# EAGLE board combined2 (EAGLE 5.11)
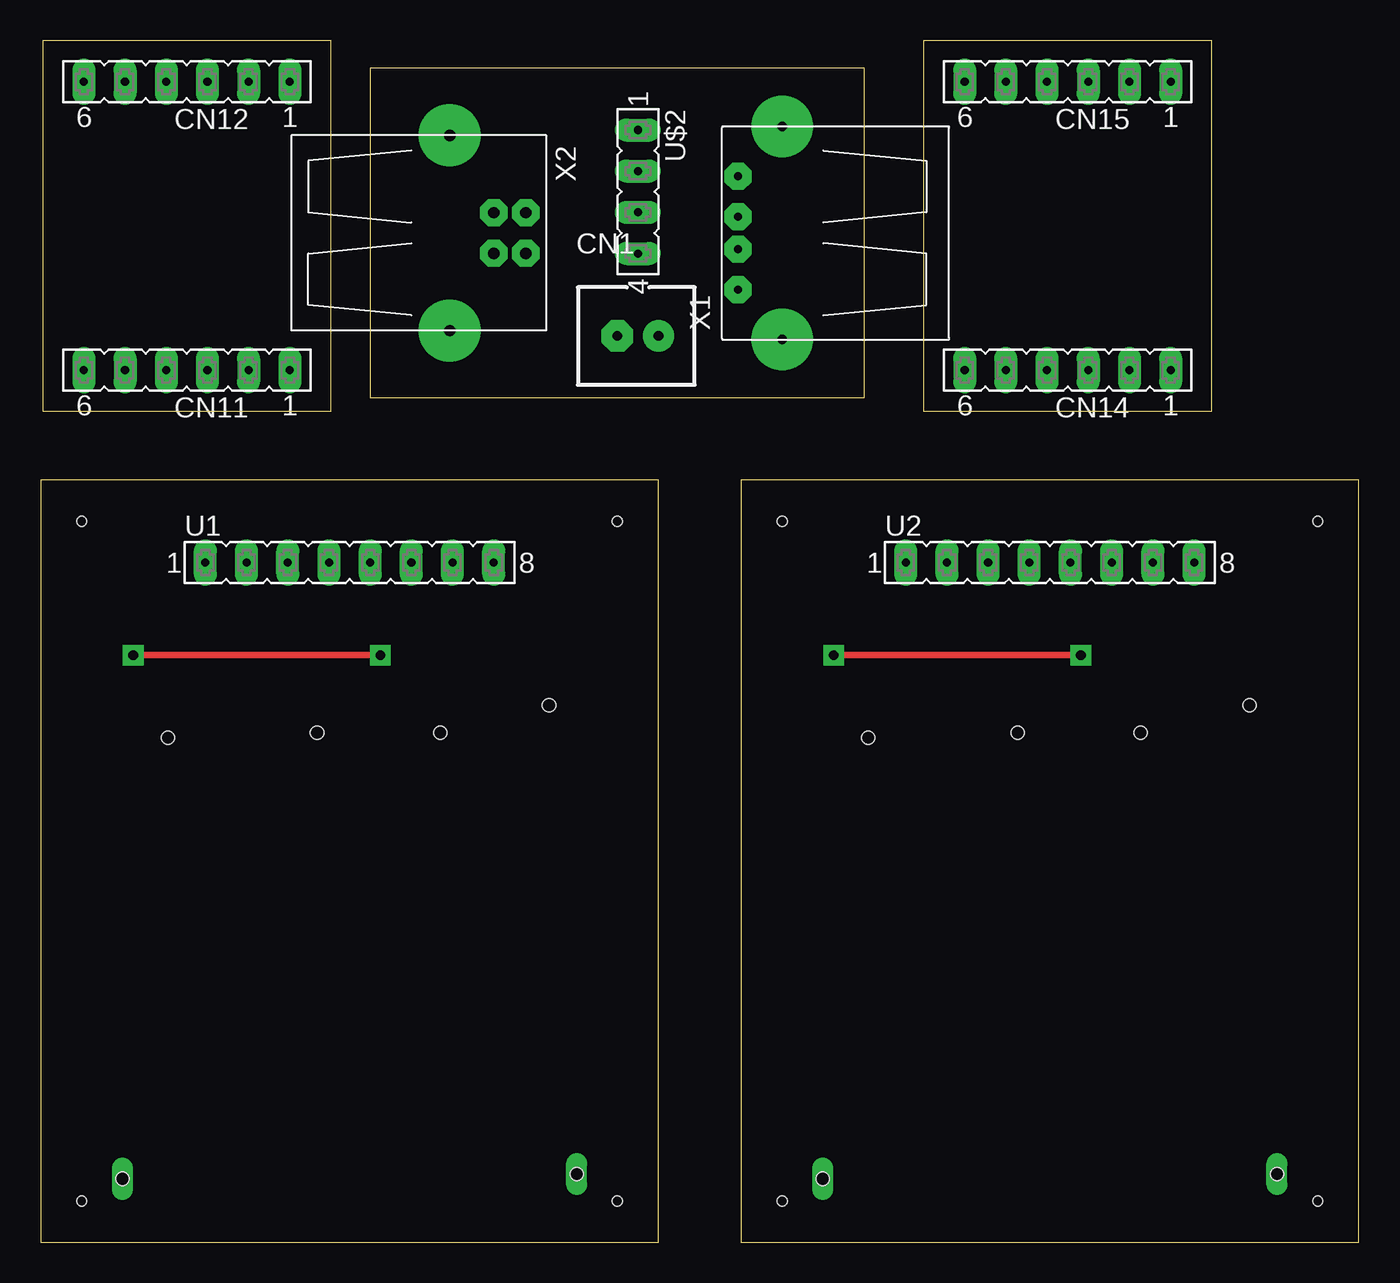
[diagram p0: board, top side]
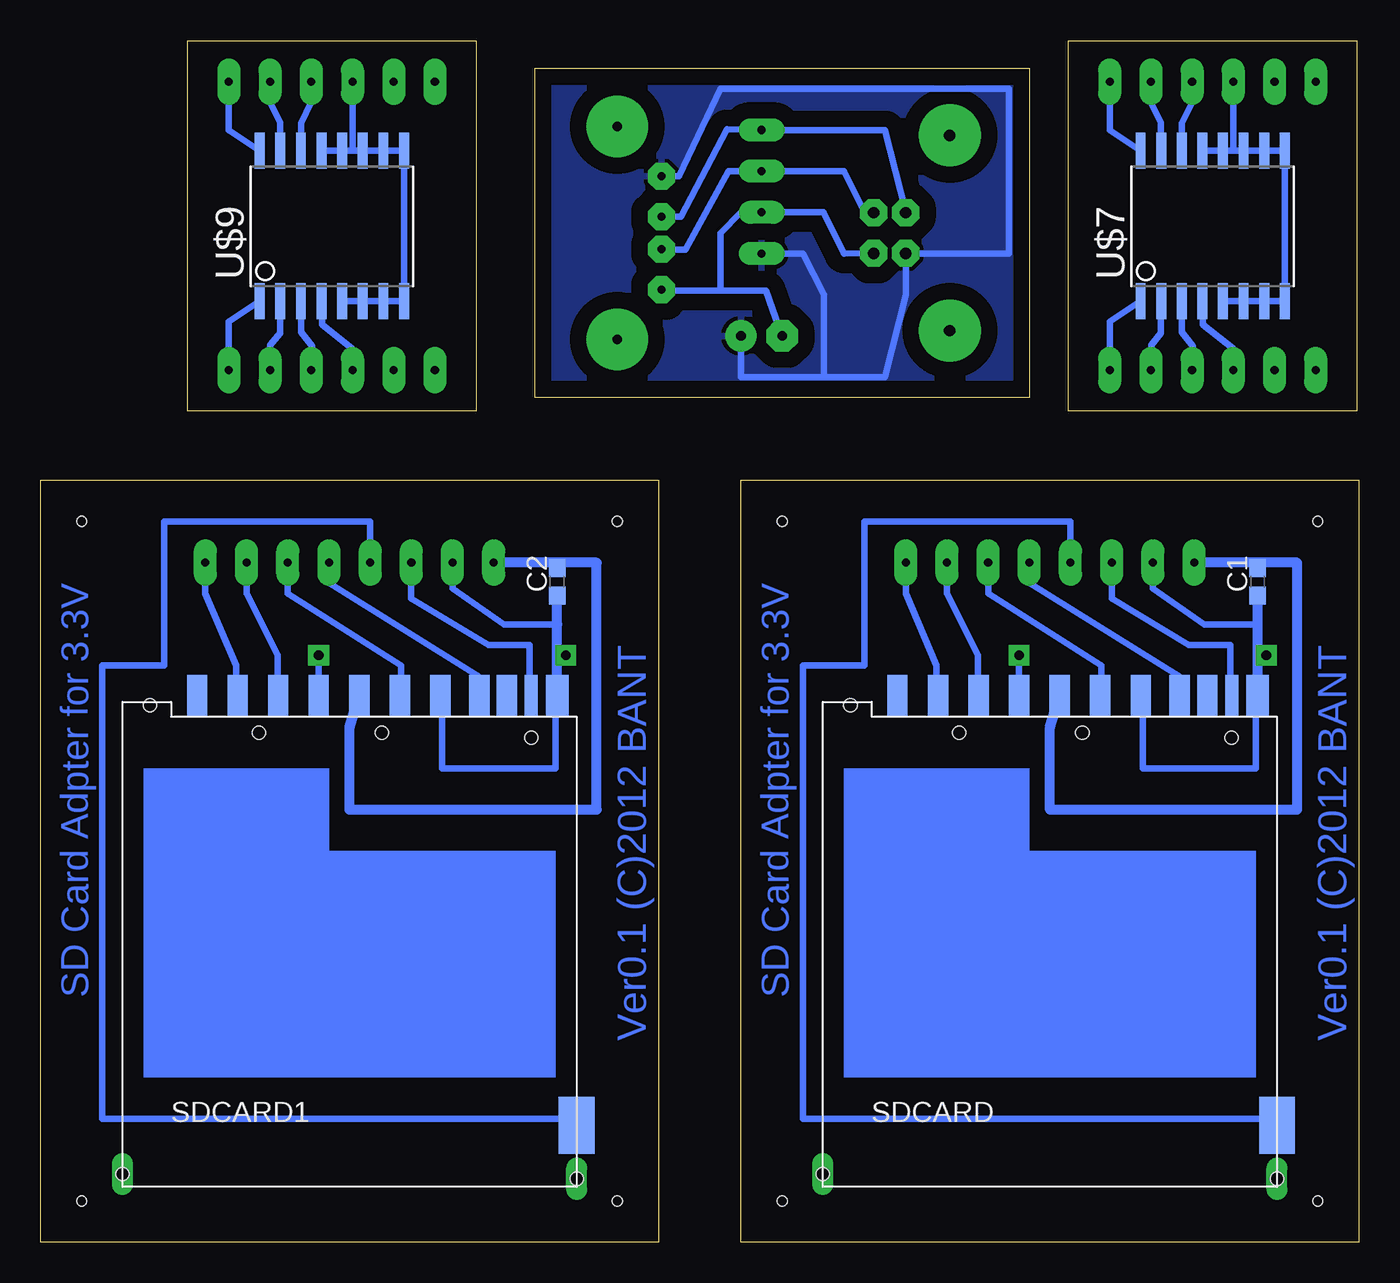
[diagram p1: board, bottom side, seen from below]

Size 81.28 x 74.09 mm. Coordinates in mm from the lower left corner, seen from the top.
Outline: 0.13,51.23 17.91,51.23 17.91,74.09 0.13,74.09 0.13,51.23
Outline: 54.43,51.23 72.21,51.23 72.21,74.09 54.43,74.09 54.43,51.23
Outline: 0,0 38.1,0 38.1,46.99 0,46.99 0,0
Outline: 43.18,0 81.28,0 81.28,46.99 43.18,46.99 43.18,0
Outline: 20.32,52.07 50.8,52.07 50.8,72.39 20.32,72.39 20.32,52.07
Copper layers (1*16): Top 0.035mm / dielectric 1.5mm / Bottom 0.035mm
Design rules "default": minimum track width 10mil, minimum drill 24mil, track to track 8mil, track to pad 8mil, pad to pad 8mil, via to via 8mil, smd to smd 8mil, copper to edge 40mil, drill to drill 8mil, minimum pad ring 10mil, minimum via ring 8mil, stop-mask expansion 4mil, vias tented up to drill 0mil, thermal gap 10mil
Holes 0.6 mm at 35.56,44.45 35.56,2.54 2.54,2.54 2.54,44.45 78.74,44.45 78.74,2.54 45.72,2.54 45.72,44.45

## Footprints (pad centres in the part's own frame; a part is rotated, then mirrored left to right if it is on the bottom)
C1608 = smd 1.1 x 1: 1 -0.85,0; 2 0.85,0
CON_HRS_DIP_2 = drill 0.6 pad 1.93 octagon: 1 -1.27,0 | drill 0.6 pad 1.93 round: 2 1.27,0
CON-S6-1 = drill 0.5 pad 1.422 long: 1 -5.08,0; 2 -2.54,0; 3 0,0; 4 2.54,0; 5 5.08,0; 6 7.62,0
DM1B-DSF-PEJ = smd 1.25 x 2.5: 1 -6.9,15.3; 2 -4.4,15.3; 3 -1.9,15.3; 4 0.6,15.3; 5 3.1,15.3; 6 5.6,15.3; 7 8,15.3; 8 9.7,15.3; 9 -9.4,15.3 | smd 1.4 x 2.5: COM 12.8,15.3 | smd 0.8 x 2.5: DET 11.2,15.3 | drill 0.8 pad 1.2 long: P$17 14,-14.5 | drill 0.8 pad 1.27 long: P$18 -14,-14.2 | smd 2.2 x 3.5: WP 14,-11.2 | hole 0.8: -12.3,14.7; -5.6,13; 2,13; 11.2,12.7; -14,-14.2; 14,-14.5
CON-S8-1 = drill 0.5 pad 1.422 long: 1 -8.89,0; 2 -6.35,0; 3 -3.81,0; 4 -1.27,0; 5 1.27,0; 6 3.81,0; 7 6.35,0; 8 8.89,0
CON-S4-1 = drill 0.5 pad 1.422 long: 1 -3.81,0; 2 -1.27,0; 3 1.27,0; 4 3.81,0
SO16L$ = smd 0.61 x 2.21: 1 -4.445,-4.636; 2 -3.175,-4.636; 3 -1.905,-4.636; 4 -0.635,-4.636; 5 0.635,-4.636; 6 1.905,-4.636; 7 3.175,-4.636; 8 4.445,-4.636; 9 4.445,4.636; 10 3.175,4.636; 11 1.905,4.636; 12 0.635,4.636; 13 -0.635,4.636; 14 -1.905,4.636; 15 -3.175,4.636; 16 -4.445,4.636
USB-A-H = drill 0.5 pad 1.676 octagon: D+ 2.718,-1.003; D- 2.718,1.003; GND 2.718,-3.493; VBUS 2.718,3.493 | drill 0.6 pad 3.81 round: P$5 0,-6.566; P$6 0,6.566
USB-B-H = drill 0.7 pad 1.676 octagon: D+ 0,1.25; D- 1.981,1.25; GND 0,-1.25; VBUS 1.981,-1.25 | drill 0.7 pad 3.81 round: P$1 -2.718,-6.02; P$2 -2.718,6.02

## Placement (x,y rotation side)
C1  0.1u  [C1608]  6.25,40.72 90 bottom
C2  0.1u  [C1608]  49.43,40.72 90 bottom
CN1  [CON_HRS_DIP_2]  36.83,55.88 0 top
CN11  CON-S6-1  [CON-S6-1]  10.29,53.77 180 top
CN12  CON-S6-1  [CON-S6-1]  10.29,71.55 180 top
CN14  CON-S6-1  [CON-S6-1]  64.59,53.77 180 top
CN15  CON-S6-1  [CON-S6-1]  64.59,71.55 180 top
SDCARD  DM1B-DSF-PEJ  [DM1B-DSF-PEJ]  19.05,18.41 0 bottom
SDCARD1  DM1B-DSF-PEJ  [DM1B-DSF-PEJ]  62.23,18.41 0 bottom
U1  CON-S8  [CON-S8-1]  19.05,41.91 0 top
U2  CON-S8  [CON-S8-1]  62.23,41.91 0 top
U$2  CON-S4-1  [CON-S4-1]  36.83,64.77 270 top
U$7  MAX-DS3231S  [SO16L$]  9.02,62.66 0 bottom
U$9  MAX-DS3231S  [SO16L$]  63.32,62.66 0 bottom
X1  [USB-A-H]  45.72,62.23 180 top
X2  [USB-B-H]  27.94,62.23 0 top

## Library data of the parts
C1 C2 CN1 CN11 CN12 CN14 CN15 = MyLib
SDCARD SDCARD1 = sd-card
U1 U2 U$2 = bant
U$7 U$9 = bant2
X1 X2 = con-usb

## Nets
3.3V: C1.2 SDCARD.4 U1.1
3.3V1: C2.2 SDCARD1.4 U2.1
GND: C1.1 SDCARD.3 SDCARD.6 SDCARD.COM U1.2
GND1: C2.1 SDCARD1.3 SDCARD1.6 SDCARD1.COM U2.2
GND2: CN1.2 U$2.4 X1.GND X2.GND
GND6: CN12.4 U$7.5 U$7.6 U$7.7 U$7.8 U$7.9 U$7.10 U$7.11 U$7.12 U$7.13
GND8: CN15.4 U$9.5 U$9.6 U$9.7 U$9.8 U$9.9 U$9.10 U$9.11 U$9.12 U$9.13
N$1: SDCARD.1 U1.8
N$2: SDCARD.2 U1.7
N$3: SDCARD1.5 U2.6
N$4: SDCARD.5 U1.6
N$5: SDCARD.7 U1.5
N$6: SDCARD.WP U1.4
N$7: SDCARD.DET U1.3
N$8: SDCARD1.7 U2.5
N$9: SDCARD1.WP U2.4
N$10: SDCARD1.DET U2.3
N$11: SDCARD1.1 U2.8
N$12: SDCARD1.2 U2.7
N$13: U$2.1 X1.D+ X2.D+
N$14: U$2.2 X1.D- X2.D-
N$33: CN11.1 U$7.1
N$34: CN11.2 U$7.2
N$35: CN11.3 U$7.3
N$36: CN11.4 U$7.4
N$37: CN12.1 U$7.16
N$38: CN12.2 U$7.15
N$39: CN12.3 U$7.14
N$42: CN14.1 U$9.1
N$43: CN14.2 U$9.2
N$44: CN14.3 U$9.3
N$45: CN14.4 U$9.4
N$46: CN15.1 U$9.16
N$47: CN15.2 U$9.15
N$48: CN15.3 U$9.14
VCC: CN1.1 U$2.3 X1.VBUS X2.VBUS

## Tracks (layer width: path | path; a pad name or v marks a point on that pad's centre or on a via)
3.3V
  Bottom 0.406: C1.2 6.35,41.57 6.35,41.91
  Bottom 0.61: SDCARD.4 19.05,31.75 19.05,26.67 3.81,26.67 3.81,41.91 6.35,41.91 U1.1
3.3V1
  Bottom 0.406: C2.2 49.53,41.57 49.53,41.91
  Bottom 0.61: SDCARD1.4 62.23,31.75 62.23,26.67 46.99,26.67 46.99,41.91 49.53,41.91 U2.1
GND  (via drill 0.6 pad 1.27)
  Top 0.406: v5.71,36.2 v20.95,36.2
  Bottom 0.254: 13.34,33.02 SDCARD.6 | 6.35,33.02 SDCARD.COM
  Bottom 0.406: 13.34,33.02 13.34,29.21 6.35,29.21 6.35,33.02 | U1.2 12.7,40.32 9.53,38.1 6.25,38.1 | C1.1 | SDCARD.3 v20.95,36.2 | SDCARD.COM 6.25,33.66 | 6.25,36.2 v5.71,36.2
  Bottom 0.61: C1.1 6.25,38.1 6.25,36.2 SDCARD.COM
GND1  (via drill 0.6 pad 1.27)
  Top 0.406: v48.9,36.2 v64.14,36.2
  Bottom 0.254: 56.52,33.02 SDCARD1.6 | 49.53,33.02 SDCARD1.COM
  Bottom 0.406: 56.52,33.02 56.52,29.21 49.53,29.21 49.53,33.02 | U2.2 55.88,40.32 52.7,38.1 49.43,38.1 | C2.1 | SDCARD1.3 v64.14,36.2 | SDCARD1.COM 49.43,33.66 | 49.43,36.2 v48.9,36.2
  Bottom 0.61: C2.1 49.43,38.1 49.43,36.2 SDCARD1.COM
GND2
  Bottom 0.406: 32.98,53.34 29.21,53.34 27.94,58.42 X2.GND 27.94,60.96 21.59,60.96 21.59,71.12 39.37,71.12 41.91,65.72 X1.GND | 32.98,53.34 38.1,53.34 CN1.2 | U$2.4 34.29,60.96 32.98,58.42 32.98,53.34
  pour Bottom (isolate 1.016): 20.32,72.39 20.32,52.07 50.8,52.07 50.8,72.39
GND6
  Bottom 0.406: U$7.13 U$7.12 7.75,67.3 | 7.75,67.3 U$7.11 U$7.10 U$7.9 U$7.8 U$7.7 U$7.6 U$7.5 | 7.75,67.3 CN12.4
GND8
  Bottom 0.406: U$9.13 U$9.12 62.05,67.3 | 62.05,67.3 U$9.11 U$9.10 U$9.9 U$9.8 U$9.7 U$9.6 U$9.5 | 62.05,67.3 CN15.4
N$1
  Bottom 0.254: SDCARD.1 26.04,33.66
  Bottom 0.406: 26.04,33.66 26.04,35.56 27.94,40.01 U1.8
N$2
  Bottom 0.406: SDCARD.2 23.5,33.72 23.5,36.2 25.4,40.01 U1.7
N$3
  Bottom 0.406: SDCARD1.5 59.05,33.08 59.05,35.56 66.04,40.01 U2.6
N$4
  Bottom 0.406: SDCARD.5 15.88,33.08 15.88,35.56 22.86,40.01 U1.6
N$5
  Bottom 0.406: SDCARD.7 11.11,33.72 11.11,34.92 20.32,40.64 U1.5
N$6
  Bottom 0.254: SDCARD.WP 5.08,7.62
  Bottom 0.406: 5.08,7.62 34.29,7.62 34.29,35.56 30.48,35.56 30.48,44.45 17.78,44.45 U1.4
N$7
  Bottom 0.254: SDCARD.DET 7.94,33.66
  Bottom 0.406: 7.94,33.66 7.94,36.83 10.48,36.83 15.24,39.69 U1.3
N$8
  Bottom 0.406: SDCARD1.7 54.29,33.72 54.29,34.92 63.5,40.64 U2.5
N$9
  Bottom 0.254: SDCARD1.WP 48.26,7.62
  Bottom 0.406: 48.26,7.62 77.47,7.62 77.47,35.56 73.66,35.56 73.66,44.45 60.96,44.45 U2.4
N$10
  Bottom 0.254: SDCARD1.DET 51.12,33.66
  Bottom 0.406: 51.12,33.66 51.12,36.83 53.66,36.83 58.42,39.69 U2.3
N$11
  Bottom 0.254: SDCARD1.1 69.22,33.66
  Bottom 0.406: 69.22,33.66 69.22,35.56 71.12,40.01 U2.8
N$12
  Bottom 0.406: SDCARD1.2 66.67,33.72 66.67,36.2 68.58,40.01 U2.7
N$13
  Bottom 0.254: X2.D+ 27.94,63.5
  Bottom 0.406: 27.94,63.5 29.21,68.58 U$2.1 38.95,68.63 41.81,63.22 42.9,63.22 X1.D+
N$14
  Bottom 0.406: X2.D- 30.48,63.5 31.75,66.04 U$2.2 38.88,66.04 41.52,61.21 42.98,61.21 X1.D-
N$33
  Bottom 0.406: U$7.1 15.37,56.76 CN11.1
N$34
  Bottom 0.406: U$7.2 12.21,56.05 12.81,55.31 CN11.2
N$35
  Bottom 0.406: U$7.3 10.91,56.1 10.24,55.24 CN11.3
N$36
  Bottom 0.406: U$7.4 9.63,56.59 7.76,55.09 CN11.4
N$37
  Bottom 0.406: U$7.16 15.37,68.57 CN12.1
N$38
  Bottom 0.406: U$7.15 12.22,69.02 12.83,70.28 CN12.2
N$39
  Bottom 0.406: U$7.14 10.92,69 10.29,70.28 CN12.3
N$42
  Bottom 0.406: U$9.1 69.67,56.76 CN14.1
N$43
  Bottom 0.406: U$9.2 66.51,56.05 67.12,55.31 CN14.2
N$44
  Bottom 0.406: U$9.3 65.22,56.1 64.55,55.24 CN14.3
N$45
  Bottom 0.406: U$9.4 63.93,56.59 62.06,55.09 CN14.4
N$46
  Bottom 0.406: U$9.16 69.67,68.57 CN15.1
N$47
  Bottom 0.406: U$9.15 66.52,69.02 67.13,70.28 CN15.2
N$48
  Bottom 0.406: U$9.14 65.23,69 64.59,70.28 CN15.3
VCC
  Bottom 0.406: X2.VBUS 31.75,60.96 33.02,63.5 U$2.3 38.1,63.5 39.37,62.23 39.37,58.67 | X1.VBUS 42.94,58.67 39.37,58.67 | CN1.1 36.56,58.67 39.37,58.67
(copper drawn outside any net)
  shapes: Bottom area x6

## Text on the board
Bottom: SD Card Adpter for 3.3V | SD Card Adpter for 3.3V | Ver0.1 (C)2012 BANT | Ver0.1 (C)2012 BANT